# EAGLE board eom_test_pcb (EAGLE 9.6.2)
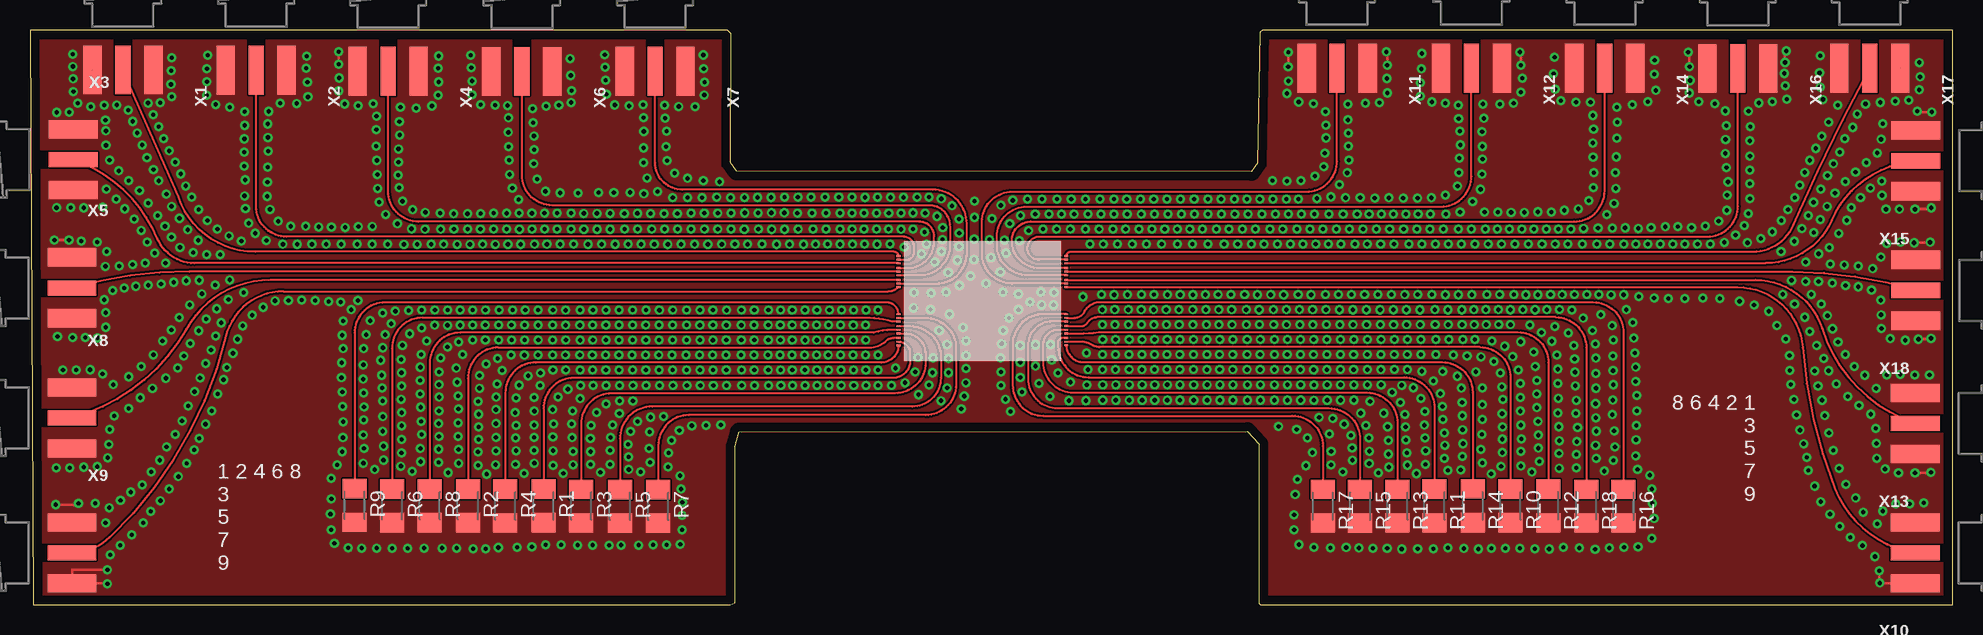
[diagram p0: board, top side]
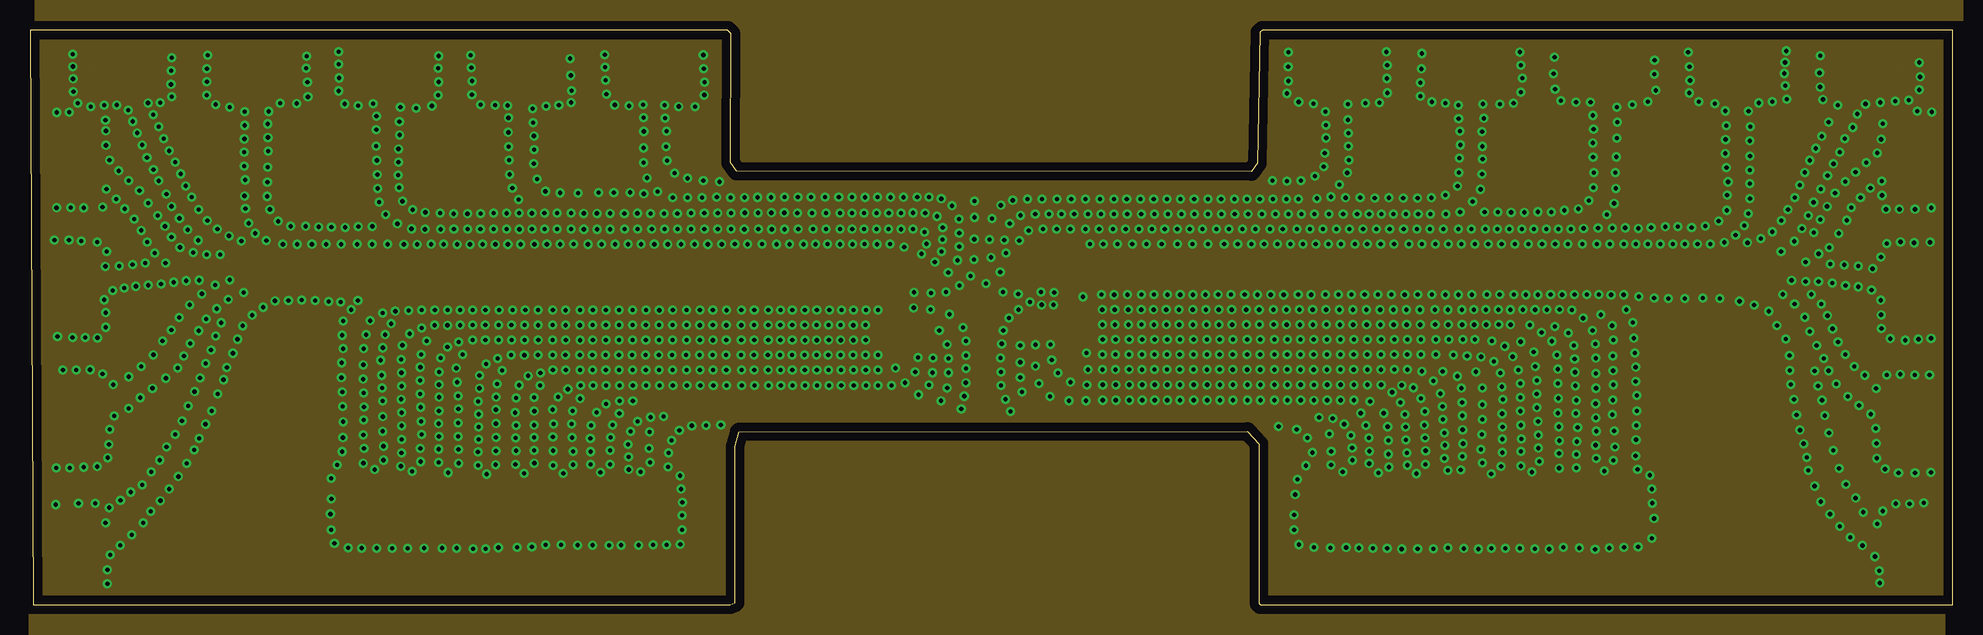
[diagram p1: board, inner layer Route2]
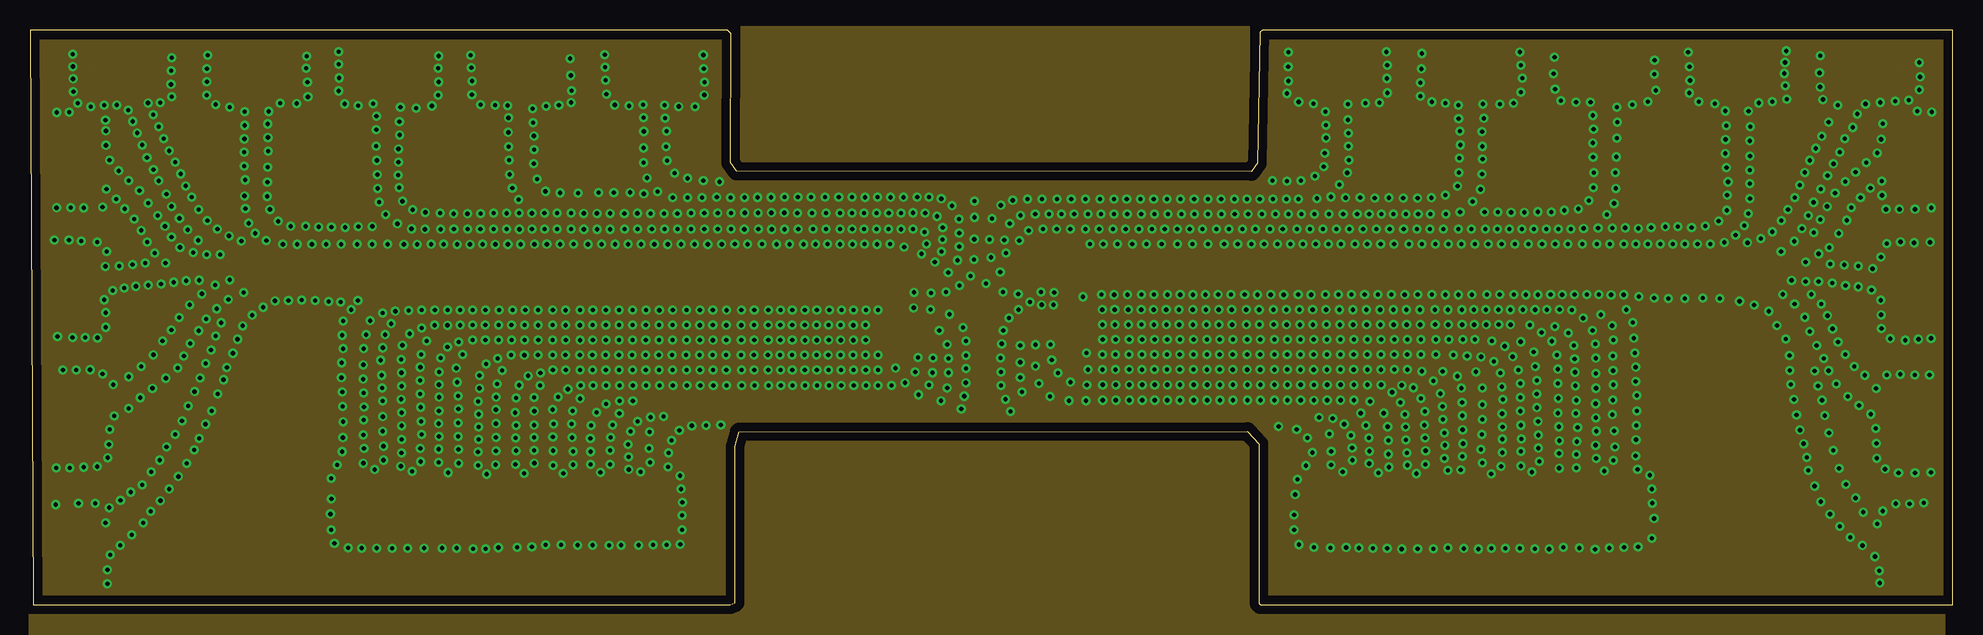
[diagram p2: board, inner layer Route15]
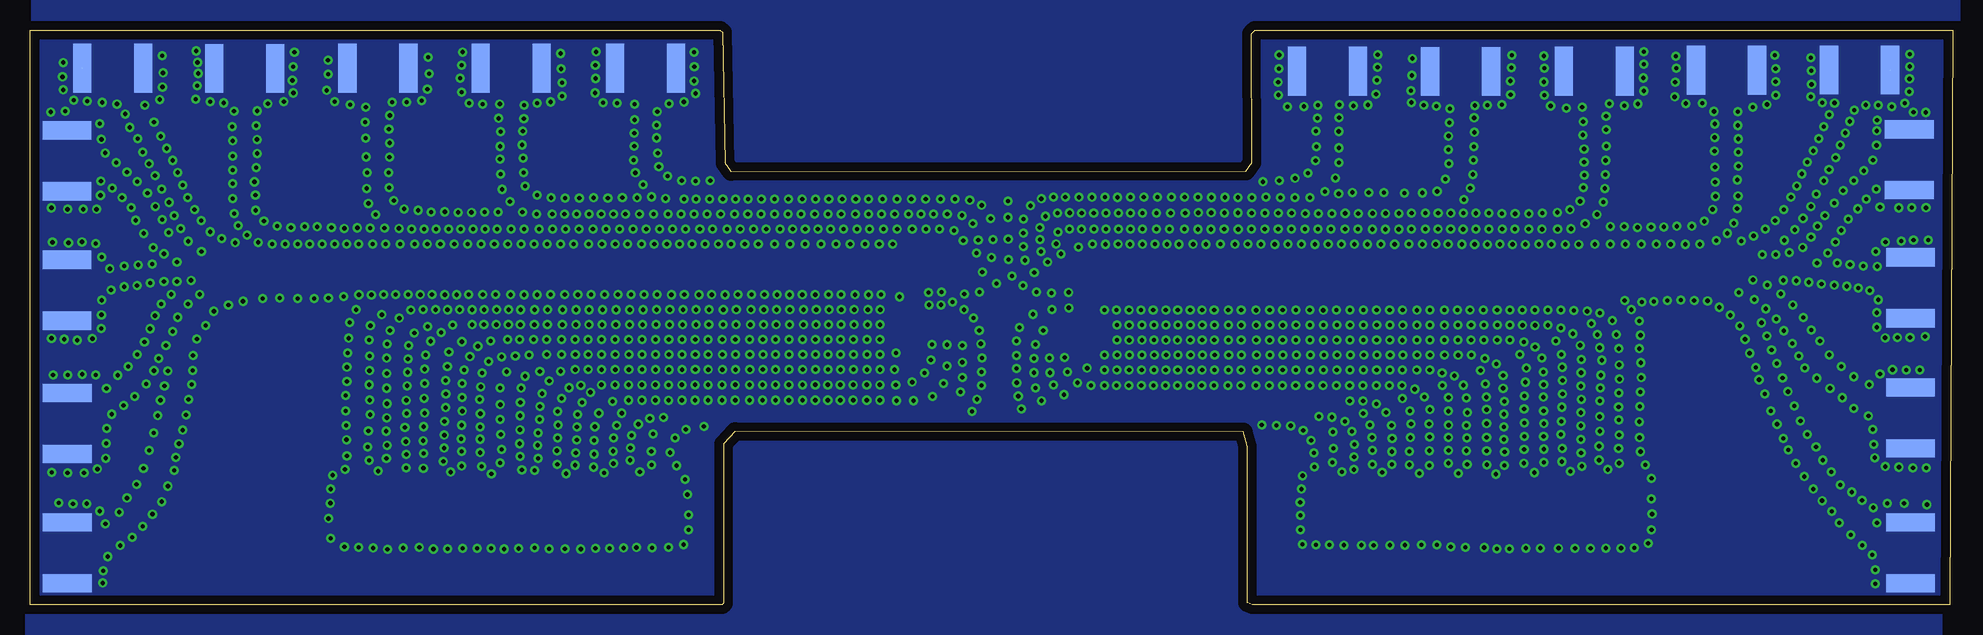
[diagram p3: board, bottom side, seen from below]

Size 160.25 x 47.95 mm. Coordinates in mm from the lower left corner, seen from the top.
Outline: 0.25,0 58.36,0 58.77,0.16 58.77,13.23 59.11,14.43 101.5,14.46 102.43,13.44 102.43,0.15 102.58,0 160.25,0 160.25,47.93 102.72,47.94 102.52,47.74 102.33,36.84 101.81,36.13 58.91,36.16 58.41,36.87 58.42,47.64 58.16,47.93 0,47.93 0.25,0
Copper layers (1*2+15+16): Top 0.035mm / dielectric 4mil / Route2 0.035mm / dielectric 1.15mm / Route15 0.035mm / dielectric 0.2mm / Bottom 0.035mm
Design rules "default *": minimum track width 6mil, minimum drill 0.35mm, track to track 3mil, track to pad 3mil, pad to pad 4mil, via to via 6mil, smd to smd 6mil, copper to edge 30mil, drill to drill 6mil, minimum pad ring 10mil, minimum via ring 8mil, stop-mask expansion 4mil, vias tented up to drill 0mil, thermal gap 10mil

## Footprints (pad centres in the part's own frame; a part is rotated, then mirrored left to right if it is on the bottom)
M1206 = smd 1.6 x 2: 1 -1.4,0; 2 1.4,0
SIGNAL_BONDING_PAD = smd 0.152 x 0.305: P$1 0,0
SMA_EDGELAUNCH = smd 4.064 x 1.524: GND@1 2.032,-2.54; GND@2 2.032,2.54 | smd 4.064 x 1.524 bottom: GND@3 2.032,2.54; GND@4 2.032,-2.54 | smd 4.064 x 1.27: P 2.032,0

## Placement (x,y rotation side)
R1  [M1206]  42.8,8.26 270 top
R2  [M1206]  36.5,8.25 270 top
R3  [M1206]  45.94,8.24 270 top
R4  [M1206]  39.62,8.25 270 top
R5  [M1206]  49.17,8.21 270 top
R6  [M1206]  30.18,8.26 270 top
R7  [M1206]  52.37,8.22 270 top
R8  [M1206]  33.32,8.26 270 top
R9  [M1206]  27.05,8.29 270 top
R10  [M1206]  123.41,8.26 270 top
R11  [M1206]  117.07,8.25 270 top
R12  [M1206]  126.56,8.25 270 top
R13  [M1206]  113.98,8.24 270 top
R14  [M1206]  120.26,8.26 270 top
R15  [M1206]  110.87,8.23 270 top
R16  [M1206]  132.83,8.23 270 top
R17  [M1206]  107.76,8.24 270 top
R18  [M1206]  129.72,8.24 270 top
U$1  SIGNAL_BONDING_DEVICE  [SIGNAL_BONDING_PAD]  72.39,29.09 90 top
U$2  SIGNAL_BONDING_DEVICE  [SIGNAL_BONDING_PAD]  72.39,21.94 90 top
U$3  SIGNAL_BONDING_DEVICE  [SIGNAL_BONDING_PAD]  72.39,28.79 90 top
U$4  SIGNAL_BONDING_DEVICE  [SIGNAL_BONDING_PAD]  72.39,22.24 90 top
U$5  SIGNAL_BONDING_DEVICE  [SIGNAL_BONDING_PAD]  72.39,28.49 90 top
U$6  SIGNAL_BONDING_DEVICE  [SIGNAL_BONDING_PAD]  72.39,22.64 90 top
U$7  SIGNAL_BONDING_DEVICE  [SIGNAL_BONDING_PAD]  72.39,28.09 90 top
U$8  SIGNAL_BONDING_DEVICE  [SIGNAL_BONDING_PAD]  72.39,21.64 90 top
U$9  SIGNAL_BONDING_DEVICE  [SIGNAL_BONDING_PAD]  72.39,27.79 90 top
U$10  SIGNAL_BONDING_DEVICE  [SIGNAL_BONDING_PAD]  72.39,23.24 90 top
U$11  SIGNAL_BONDING_DEVICE  [SIGNAL_BONDING_PAD]  72.39,27.49 90 top
U$12  SIGNAL_BONDING_DEVICE  [SIGNAL_BONDING_PAD]  72.39,23.64 90 top
U$13  SIGNAL_BONDING_DEVICE  [SIGNAL_BONDING_PAD]  72.39,26.8 90 top
U$14  SIGNAL_BONDING_DEVICE  [SIGNAL_BONDING_PAD]  72.39,23.94 90 top
U$15  SIGNAL_BONDING_DEVICE  [SIGNAL_BONDING_PAD]  72.39,27.1 90 top
U$16  SIGNAL_BONDING_DEVICE  [SIGNAL_BONDING_PAD]  72.39,22.94 90 top
U$17  SIGNAL_BONDING_DEVICE  [SIGNAL_BONDING_PAD]  72.39,26.5 90 top
U$18  SIGNAL_BONDING_DEVICE  [SIGNAL_BONDING_PAD]  72.39,24.24 90 top
U$19  SIGNAL_BONDING_DEVICE  [SIGNAL_BONDING_PAD]  86.38,26.5 90 top
U$20  SIGNAL_BONDING_DEVICE  [SIGNAL_BONDING_PAD]  86.38,21.95 90 top
U$21  SIGNAL_BONDING_DEVICE  [SIGNAL_BONDING_PAD]  86.38,26.8 90 top
U$22  SIGNAL_BONDING_DEVICE  [SIGNAL_BONDING_PAD]  86.38,22.25 90 top
U$23  SIGNAL_BONDING_DEVICE  [SIGNAL_BONDING_PAD]  86.38,27.49 90 top
U$24  SIGNAL_BONDING_DEVICE  [SIGNAL_BONDING_PAD]  86.38,22.64 90 top
U$25  SIGNAL_BONDING_DEVICE  [SIGNAL_BONDING_PAD]  86.38,27.1 90 top
U$26  SIGNAL_BONDING_DEVICE  [SIGNAL_BONDING_PAD]  86.38,22.94 90 top
U$27  SIGNAL_BONDING_DEVICE  [SIGNAL_BONDING_PAD]  86.39,28.09 90 top
U$28  SIGNAL_BONDING_DEVICE  [SIGNAL_BONDING_PAD]  86.38,21.65 90 top
U$29  SIGNAL_BONDING_DEVICE  [SIGNAL_BONDING_PAD]  86.39,28.49 90 top
U$30  SIGNAL_BONDING_DEVICE  [SIGNAL_BONDING_PAD]  86.38,23.64 90 top
U$31  SIGNAL_BONDING_DEVICE  [SIGNAL_BONDING_PAD]  86.39,28.79 90 top
U$32  SIGNAL_BONDING_DEVICE  [SIGNAL_BONDING_PAD]  86.38,23.94 90 top
U$33  SIGNAL_BONDING_DEVICE  [SIGNAL_BONDING_PAD]  86.39,29.09 90 top
U$34  SIGNAL_BONDING_DEVICE  [SIGNAL_BONDING_PAD]  86.38,24.24 90 top
U$35  SIGNAL_BONDING_DEVICE  [SIGNAL_BONDING_PAD]  86.38,27.79 90 top
U$36  SIGNAL_BONDING_DEVICE  [SIGNAL_BONDING_PAD]  86.38,23.24 90 top
X1  [SMA_EDGELAUNCH]  7.74,46.63 270 top
X2  [SMA_EDGELAUNCH]  18.84,46.62 270 top
X3  [SMA_EDGELAUNCH]  1.57,37.12 0 top
X4  [SMA_EDGELAUNCH]  29.85,46.53 270 top
X5  [SMA_EDGELAUNCH]  1.46,26.43 0 top
X6  [SMA_EDGELAUNCH]  41,46.51 270 top
X7  [SMA_EDGELAUNCH]  52.11,46.53 270 top
X8  [SMA_EDGELAUNCH]  1.46,15.59 0 top
X9  [SMA_EDGELAUNCH]  1.47,4.34 0 top
X10  [SMA_EDGELAUNCH]  159.18,4.34 180 top
X11  [SMA_EDGELAUNCH]  108.95,46.78 270 top
X12  [SMA_EDGELAUNCH]  120.15,46.79 270 top
X13  [SMA_EDGELAUNCH]  159.18,15.13 180 top
X14  [SMA_EDGELAUNCH]  131.25,46.78 270 top
X15  [SMA_EDGELAUNCH]  159.21,37.03 180 top
X16  [SMA_EDGELAUNCH]  142.36,46.76 270 top
X17  [SMA_EDGELAUNCH]  153.36,46.78 270 top
X18  [SMA_EDGELAUNCH]  159.21,26.23 180 top

## Library data of the parts
R1-R18 X1-X18 = adafruit
U$1-U$36 = eom_chip_lib

## Nets
GND: R1.2 R2.2 R3.2 R4.2 R5.2 R6.2 R7.2 R8.2 R9.2 R10.2 R11.2 R12.2 R13.2 R14.2 R15.2 R16.2 R17.2 R18.2 X1.GND@1 X1.GND@2 X1.GND@3 X1.GND@4 X2.GND@1 X2.GND@2 X2.GND@3 X2.GND@4 X3.GND@1 X3.GND@2 X3.GND@3 X3.GND@4 X4.GND@1 X4.GND@2 X4.GND@3 X4.GND@4 X5.GND@1 X5.GND@2 X5.GND@3 X5.GND@4 X6.GND@1 X6.GND@2 X6.GND@3 X6.GND@4 X7.GND@1 X7.GND@2 X7.GND@3 X7.GND@4 X8.GND@1 X8.GND@2 X8.GND@3 X8.GND@4 X9.GND@1 X9.GND@2 X9.GND@3 X9.GND@4 X10.GND@1 X10.GND@2 X10.GND@3 X10.GND@4 X11.GND@1 X11.GND@2 X11.GND@3 X11.GND@4 X12.GND@1 X12.GND@2 X12.GND@3 X12.GND@4 X13.GND@1 X13.GND@2 X13.GND@3 X13.GND@4 X14.GND@1 X14.GND@2 X14.GND@3 X14.GND@4 X15.GND@1 X15.GND@2 X15.GND@3 X15.GND@4 X16.GND@1 X16.GND@2 X16.GND@3 X16.GND@4 X17.GND@1 X17.GND@2 X17.GND@3 X17.GND@4 X18.GND@1 X18.GND@2 X18.GND@3 X18.GND@4
N$1: U$1.P$1 X1.P
N$2: R1.1 U$2.P$1
N$3: U$3.P$1 X2.P
N$4: R2.1 U$4.P$1
N$5: U$5.P$1 X3.P
N$6: R3.1 U$6.P$1
N$7: U$7.P$1 X4.P
N$8: R4.1 U$8.P$1
N$9: U$9.P$1 X5.P
N$10: R5.1 U$10.P$1
N$11: U$11.P$1 X6.P
N$12: R6.1 U$12.P$1
N$13: U$13.P$1 X7.P
N$14: R7.1 U$14.P$1
N$15: U$15.P$1 X8.P
N$16: R8.1 U$16.P$1
N$17: U$17.P$1 X9.P
N$18: R9.1 U$18.P$1
N$19: U$19.P$1 X10.P
N$20: R10.1 U$20.P$1
N$21: U$21.P$1 X11.P
N$22: R11.1 U$22.P$1
N$23: U$23.P$1 X12.P
N$24: R12.1 U$24.P$1
N$25: U$25.P$1 X13.P
N$26: R13.1 U$26.P$1
N$27: U$27.P$1 X14.P
N$28: R14.1 U$28.P$1
N$29: U$29.P$1 X15.P
N$30: R15.1 U$30.P$1
N$31: U$31.P$1 X16.P
N$32: R16.1 U$32.P$1
N$33: U$33.P$1 X17.P
N$34: R17.1 U$34.P$1
N$35: U$35.P$1 X18.P
N$36: R18.1 U$36.P$1

## Tracks (layer width: path | path; a pad name or v marks a point on that pad's centre or on a via)
GND  (via drill 0.35, 0.35 pad 0.55)  (2 unrouted)
  Top 0.203: v158.53,41.1 157.32,41.1 v157.32,41.17 | v146.39,46.19 146.29,46.19 v146.29,45.23 | v25.74,46.13 v25.74,45.09 | v157.12,32.99 158.47,32.99 v158.47,33.11 | v158.46,22.23 158.46,22.16 v157.41,22.16 | v157.12,11 158.45,11 v158.45,11.04 | v104.88,44.88 104.89,44.88 v104.89,46.1 | v157.05,30.2 158.38,30.2 v158.38,30.24 | v138.21,46.1 138.33,46.1 v138.33,44.88 | v124.19,46.11 124.26,46.11 v124.26,45.02 | v154.18,1.82 154.18,1.8 X10.GND@2 154.15,1.8 v154.15,2.84 | v2.13,8.36 4.04,8.36 v4.04,8.46 | v113.13,45 113.13,46.12 v113.06,46.12 | v6.45,1.76 6.45,1.8 X9.GND@1 3.51,2.93 v6.45,2.93 | v2.04,30.43 v3.25,30.43
  other vias: 70.65,34 71.73,33.99 72.82,33.99 73.95,34 74.95,34 75.96,33.87 76.86,33.29 77.43,32.18 77.46,31.01 77.46,29.89 77.31,28.74 76.54,27.72 75.42,28.58 69.6,33.99 68.52,34 67.42,34 66.27,34 65.11,34.01 64.01,34.01 62.89,34 61.78,33.99 60.65,33.99 59.57,33.98 58.39,33.96 57.24,34.01 52.31,34.47 51.44,35.6 51.15,36.89 51.14,38.11 51.16,39.48 51.13,40.63 51.1,41.7 52.89,41.66 52.94,40.59 53.06,39.51 53.01,38.2 53.09,37.04 53.72,36.01 54.8,35.57 56.12,35.37 57.48,35.28 56.01,33.98 54.82,33.97 53.58,33.98 75.98,29.47 76.07,30.45 76.08,31.47 75.61,32.4 74.62,32.68 73.59,32.69 72.59,32.67 71.59,32.67 70.56,32.68 69.52,32.67 68.53,32.66 67.53,32.66 66.35,32.67 65.18,32.67 63.96,32.67 62.87,32.7 61.8,32.7 60.69,32.69 59.58,32.7 58.43,32.68 74.32,29.27 74.72,30.11 74.57,31.08 73.61,31.34 72.6,31.32 71.57,31.33 70.57,31.34 70.69,24.6 70.7,20.83 70.69,18.31 74.01,20.62 75.28,20.58 76.56,20.55 78.71,30.49 79.97,30.47 83.15,33.84 81.21,30.43 83.79,32.59 82.46,30.39 84.44,31.34 88.35,30.08 89.32,25.87 89.38,24.62 89.39,23.37 89.42,22.12 89.41,20.87 89.4,19.62 89.42,18.36 85.07,21.71 89.42,17.07 83.82,21.69 82.54,21.62 57.33,32.67 56.21,32.66 55.09,32.67 53.96,32.64 52.86,32.63 51.73,32.63 50.63,32.65 49.54,32.63 48.34,32.65 47.26,32.65 46.16,32.65 43.94,32.66 42.88,32.66 41.83,32.66 40.78,32.67 39.72,32.66 38.64,32.68 37.56,32.64 36.47,32.62 35.32,32.62 34.18,32.68 32.95,32.73 31.89,32.95 31.05,33.66 30.78,34.79 30.7,35.85 30.71,38.02 30.71,36.92 71.68,30.08 72.87,29.84 63.54,23.33 62.54,23.33 61.54,23.33 60.36,23.33 59.29,23.33 58.04,23.33 56.92,23.33 55.83,23.33 54.72,23.33 53.56,23.33 52.43,23.33 51.33,23.33 50.22,23.33 49.11,23.33 48,23.33 46.91,23.33 45.83,23.33 44.64,23.33 43.57,23.33 42.36,23.33 41.24,23.33 40.13,23.33 37.95,23.33 36.89,23.33 35.84,23.33 34.8,23.31 33.73,23.33 66.57,23.33 65.57,23.33 64.58,23.33 69.65,23.33 68.63,23.33 67.57,23.33 63.54,24.6 62.55,24.59 61.55,24.59 60.37,24.59 59.3,24.58 58.05,24.58 56.92,24.6 55.84,24.6 54.73,24.59 53.58,24.6 52.46,24.58 51.35,24.59 50.23,24.59 49.11,24.59 48.01,24.59 46.92,24.59 45.84,24.58 44.65,24.58 43.58,24.58 42.36,24.6 41.29,24.59 40.22,24.59 37.96,24.59 36.9,24.59 35.86,24.58 34.82,24.58 33.74,24.58 39.11,24.59 39.07,23.33 69.69,24.58 68.63,24.58 67.64,24.59 66.63,24.59 65.58,24.58 64.59,24.59 69.53,31.34 68.53,31.34 67.53,31.34 66.36,31.34 65.28,31.34 64.04,31.33 62.89,31.32 61.83,31.32 60.71,31.34 59.54,31.32 58.44,31.33 57.33,31.33 56.21,31.34 55.1,31.34 53.99,31.34 52.9,31.34 51.83,31.34 50.64,31.33 49.56,31.34 48.35,31.32 47.26,31.32 46.16,31.32 43.94,31.34 42.89,31.34 41.84,31.33 40.79,31.32 39.73,31.33 38.65,31.34 37.54,31.34 36.49,31.34 35.33,31.34 34.22,31.33 66.47,30.08 65.48,30.07 64.48,30.07 63.3,30.08 62.23,30.07 61.02,30.08 59.81,30.07 58.75,30.08 57.66,30.07 56.5,30.07 55.39,30.07 54.28,30.08 53.16,30.07 52.04,30.08 50.94,30.08 49.85,30.07 48.77,30.07 47.64,30.07 46.51,30.07 45.32,30.08 44.2,30.07 43.08,30.08 40.89,30.07 39.83,30.07 38.79,30.07 37.73,30.08 36.67,30.07 35.6,30.07 34.49,30.07 33.44,30.07 32.28,30.07 31.16,30.07 42.04,30.08 45.1,31.34 69.55,30.08 68.56,30.08 67.52,30.08 70.61,30.07 45.09,32.67 63.54,22.08 62.55,22.08 61.54,22.08 60.37,22.08 59.29,22.08 58.04,22.08 56.92,22.08 55.84,22.08 54.72,22.08 53.56,22.08 52.44,22.08 51.33,22.08 50.22,22.08 49.11,22.08 48,22.08 46.91,22.08 45.86,22.08 44.66,22.08 43.57,22.08 42.37,22.08 41.24,22.08 40.14,22.08 37.96,22.08 36.9,22.08 66.58,22.08 65.58,22.08 64.6,22.08 69.66,22.08 68.63,22.08 67.58,22.08 39.07,22.08 63.57,18.31 62.58,18.31 61.56,18.3 60.4,18.3 59.33,18.3 58.07,18.3 56.96,18.3 55.87,18.3 54.75,18.3 53.59,18.31 52.47,18.31 51.36,18.31 50.25,18.31 49.14,18.3 48.03,18.3 46.93,18.31 45.89,18.3 66.6,18.3 65.61,18.31 64.61,18.3 69.69,18.3 68.66,18.3 67.62,18.31 50.25,17.01 49.14,17.01 63.54,19.58 62.55,19.58 61.54,19.58 60.37,19.58 59.3,19.58 58.04,19.58 56.93,19.58 55.84,19.58 54.73,19.58 53.56,19.59 52.44,19.58 51.33,19.58 50.23,19.59 49.11,19.58 48,19.58 46.91,19.59 45.86,19.58 44.66,19.58 43.58,19.58 66.57,19.58 65.58,19.58 64.59,19.58 69.66,19.58 68.64,19.58 67.59,19.58 32.92,31.32 31.8,31.36 30.63,31.78 29.64,32.56 29.1,33.59 28.98,34.73 28.95,35.89 28.91,37.07 28.85,38.27 28.87,39.62 28.88,40.75 28.6,41.79 30.82,39.19 30.79,40.3 30.87,41.51 32.19,41.42 33.5,41.61 34.02,42.52 34.05,43.61 34.02,44.77 34.05,45.78 27.35,41.63 26.24,41.78 25.74,42.86 25.77,43.94 40.74,33.79 40.21,34.76 39.98,35.9 39.94,37.09 39.91,38.22 39.87,39.41 39.88,40.62 39.82,41.65 38.77,41.69 37.57,41.72 36.84,42.55 36.85,43.69 36.79,44.81 36.72,45.85 41.91,41.37 41.93,40.23 42.01,39.11 42.02,37.97 42,36.8 42.27,35.51 42.96,34.49 44.18,34.36 45.69,34.33 47.41,34.39 48.66,34.37 50.02,34.4 51.17,34.28 43.03,41.59 44.08,41.67 45.12,41.9 45.15,42.89 45.08,44.15 45.03,45.56 49.94,41.62 48.74,41.69 48.05,42.58 47.97,43.76 47.93,44.85 47.91,45.88 56.13,45.86 56.16,44.72 56.22,43.58 56.2,42.52 55.44,41.56 54.08,41.57 28.54,31.56 27.37,31.54 26.26,31.48 25.13,31.5 24.06,31.52 22.99,31.58 21.74,31.58 20.68,31.99 20,32.98 19.76,34.07 19.79,35.27 19.8,36.52 19.84,37.84 19.83,38.98 19.82,40.11 19.88,41.15 20.86,41.83 22.22,41.81 23.17,42.37 23.12,43.6 23.03,44.76 23.06,45.76 14.81,45.84 14.75,44.72 14.75,43.63 14.74,42.51 15.47,41.73 16.64,41.5 17.9,41.14 17.9,39.99 17.87,38.86 17.85,37.77 17.84,36.6 17.93,35.44 17.88,34.11 17.96,33.05 18.23,31.83 18.78,30.99 19.7,30.38 21.08,30.08 22.27,30.07 23.5,30.08 24.69,30.08 25.94,30.08 27.27,30.08 28.51,30.08 29.82,30.08 17.62,30.34 16.59,30.77 15.62,31.35 14.79,32.04 14.06,32.96 13.47,34.02 12.99,34.94 12.56,35.95 12.11,36.93 11.61,37.87 11.15,38.88 10.73,39.88 10.28,40.88 9.84,41.85 10.86,41.87 11.82,42.38 11.75,43.41 11.78,44.54 11.81,45.64 8.18,41.25 7.24,41.69 6.19,41.68 5.06,41.56 3.98,41.83 3.62,42.81 3.59,43.87 3.58,44.9 3.56,45.94 2.24,41.07 3.26,41.08 6.29,40.43 6.33,39.53 6.34,38.33 6.63,37.09 7.4,36.2 8.22,35.38 9.13,34.55 9.86,33.51 10.64,32.48 11.25,31.58 11.79,30.67 12.5,29.82 13.61,29.38 14.74,29.22 15.86,29.21 14.03,30.4 13.14,31.28 12.46,32.24 11.8,33.23 11.37,34.26 10.73,35.37 10.29,36.31 9.75,37.29 9.35,38.36 8.93,39.36 8.57,40.32 73.68,26.06 73.66,24.77 75.1,26 75.06,24.64 76.36,26.1 77.48,26.64 78.4,27.41 78.7,28.8 78.73,32.32 78.73,33.67 81.92,33.74 80.92,33.33 80.18,32.21 81.66,31.8 82.57,32.48 83.24,31.21 80.88,27.76 80.1,28.98 81.35,29.35 75.23,19.36 74.93,18.34 74.07,17.53 76.56,19.36 76.45,18.09 75.95,17.02 76.45,21.72 75.79,22.89 73.79,19.44 72.95,18.52 71.81,18.29 72.14,19.74 16.64,27.11 15.44,26.67 14.33,25.94 13.31,25.02 12.45,23.96 11.79,22.92 11.05,22 10.29,20.86 9.27,19.89 8.23,19.03 6.93,18.37 6.05,19.26 5,19.61 3.86,19.59 2.74,19.59 2.18,11.43 3.3,11.43 4.47,11.49 5.61,11.54 6.48,12.27 6.58,13.39 6.65,14.64 7.01,15.75 8.23,16.39 9.19,17.28 10.21,18.06 11.33,18.9 12.32,19.77 12.83,20.76 13.36,21.8 14.07,22.86 14.68,23.83 15.57,24.69 16.54,25.46 17.81,26.04 15.93,23.53 15.47,22.43 15.09,21.26 14.66,20.12 14.17,18.93 13.72,17.78 13.18,16.59 12.67,15.35 12.12,14.2 11.38,13.16 10.82,12.07 10.11,11.08 9.35,10.01 27.33,25.38 25.9,25.27 24.9,25.3 23.77,25.39 22.66,25.42 21.54,25.38 20.42,25.35 19.43,24.82 18.52,24.16 17.73,23.27 17.3,22.15 16.92,20.99 16.41,19.79 16.13,18.78 15.65,17.58 15.14,16.18 14.63,15.07 14.1,13.87 13.69,12.93 13.06,11.79 12.37,10.7 11.61,9.66 10.87,8.69 10.06,7.8 9.45,6.84 8.48,5.85 7.52,4.96 6.68,4.17 8.41,9.4 7.54,8.72 6.6,8.11 6.3,6.84 5.44,8.46 77.62,16.34 77.88,17.4 78,18.52 78.03,19.72 78.03,20.81 78.03,22 77.77,23.14 76.66,24.24 81.74,16.13 81.31,17.15 80.95,18.29 80.95,19.44 80.9,20.58 81,21.77 81.13,22.89 81.61,23.93 82.4,24.62 83.36,25.25 82.37,25.91 81.1,26.09 79.68,26.8 85.37,26.04 84.28,26.09 84.33,25.02 85.32,25.02 32.64,24.59 31.57,24.54 30.45,24.49 29.39,24.34 28.35,23.7 28.02,22.53 27.81,21.37 27.79,20.02 27.76,18.83 27.81,17.68 27.84,16.51 27.81,15.42 27.79,14.18 27.84,13.06 27.79,11.82 28.73,11.28 29.46,12.07 29.46,13.24 29.39,14.48 29.41,15.7 29.39,17 29.36,18.09 29.31,19.16 29.24,20.4 29.41,21.44 29.62,22.53 30.1,23.45 32.64,23.09 31.65,22.61 31.04,21.65 30.94,20.48 30.96,19.36 30.99,18.24 30.94,17.15 30.99,16.03 30.99,14.94 30.99,13.8 30.96,12.68 30.91,11.56 31.85,11.13 32.56,11.94 32.54,13.06 32.64,14.2 32.61,15.3 32.56,16.49 32.51,17.58 32.51,18.72 32.54,19.82 32.61,20.88 33.07,22 35.74,21.93 34.8,21.52 34.24,20.58 34.11,19.44 34.09,18.37 34.11,17.33 34.09,16.18 34.06,15.12 34.09,14.05 34.06,12.98 34.06,11.89 34.85,11.03 35.74,11.82 35.71,12.96 35.69,14.05 35.69,15.17 35.71,16.34 35.69,17.43 35.61,18.57 35.53,19.74 36.07,20.88 38.99,20.55 38.02,20.1 37.46,19.13 37.46,18.06 37.36,16.97 37.39,15.91 37.39,14.84 37.39,13.8 37.34,12.76 37.36,11.64 38.07,10.9 38.81,11.69 38.84,12.83 38.84,13.97 38.84,15.12 38.84,16.29 38.86,17.33 38.94,18.42 39.34,19.54 42.54,19.33 41.53,19.11 40.77,18.32 40.51,17.25 40.44,16.03 40.51,14.97 40.49,13.92 40.51,12.86 40.46,11.71 41.2,10.98 42.04,11.82 42.01,12.88 42.01,13.97 42.01,14.99 42.04,16.16 42.01,17.3 42.52,18.29 44.83,17.99 44.02,17.35 43.56,16.29 43.64,15.09 43.59,14 43.61,12.86 43.61,11.64 44.45,10.98 45.26,11.69 45.26,12.81 45.19,13.95 45.14,15.09 45.24,16.18 45.85,17.2 48.03,16.77 47.22,16.06 46.76,14.97 46.71,13.87 46.74,12.78 46.74,11.71 47.55,11.05 48.36,11.71 48.36,12.88 48.39,13.97 48.56,15.02 49.12,15.96 52.81,15.73 51.74,15.65 50.65,15.3 50.06,14.46 49.86,13.39 49.89,12.35 49.91,11.28 50.9,11.08 51.69,11.89 51.61,13.06 51.64,14.43 57.58,15.02 56.36,14.97 55.17,14.94 54.13,14.56 53.47,13.72 53.24,12.68 53.19,11.51 54.18,10.77 54.28,9.66 54.38,8.54 54.36,7.47 54.36,6.25 54.2,5.06 53.06,5.01 51.94,5.01 50.72,4.98 49.28,4.98 48.26,4.96 46.89,4.98 45.64,4.98 44.27,5.01 42.98,5.01 41.83,4.83 40.61,4.81 39.04,4.78 37.97,4.68 36.93,4.68 35.56,4.73 34.37,4.73 32.84,4.73 31.47,4.7 30.18,4.7 28.91,4.73 27.64,4.73 26.52,4.75 25.37,5.14 25.1,6.25 25.04,7.57 25.12,8.84 25.1,10.55 25.6,11.66 26.01,12.78 26.09,13.95 26.11,15.27 26.06,16.54 26.04,17.76 25.96,18.95 25.98,20.2 26.11,21.37 26.01,22.48 26.11,23.68 26.77,24.62 11.3,28.51 10.4,29.34 9.76,30.25 9.26,31.23 8.69,32.17 7.9,33.03 7.18,33.84 6.37,34.68 2.21,33.12 3.4,33.14 4.48,33.11 6.05,33.18 4.26,30.34 5.59,30.27 6.4,29.46 6.28,28.23 7.44,28.27 8.55,28.39 9.61,28.5 14.11,27.07 13.01,27.03 11.98,26.9 10.92,26.75 9.87,26.66 8.83,26.57 7.85,26.41 6.9,26.21 6.2,25.44 6.32,24.37 6.3,23.15 5.62,22.27 4.59,22.3 3.55,22.29 2.29,22.38 63.51,20.84 62.52,20.84 61.51,20.83 60.34,20.83 59.27,20.83 58.01,20.83 56.9,20.83 55.81,20.83 54.69,20.83 53.53,20.84 52.41,20.84 51.3,20.84 50.2,20.84 49.08,20.83 47.97,20.83 46.88,20.84 45.83,20.83 44.63,20.83 43.55,20.84 42.34,20.83 41.21,20.83 40.11,20.83 66.54,20.84 65.55,20.84 64.55,20.83 69.63,20.83 68.61,20.83 67.56,20.84 101.44,33.84 102.51,33.84 103.6,33.84 104.73,33.84 105.73,33.84 100.4,33.83 99.29,33.84 98.19,33.84 97.04,33.83 95.89,33.83 94.78,33.84 93.67,33.83 92.55,33.84 91.42,33.83 90.35,33.83 89.18,33.84 87.98,33.83 86.79,33.84 85.59,33.83 84.35,33.84 116.72,32.59 115.71,32.59 114.68,32.59 113.65,32.59 112.64,32.59 111.63,32.59 110.62,32.59 109.46,32.59 108.27,32.59 107.07,32.59 105.99,32.59 104.9,32.59 103.81,32.59 102.68,32.59 101.54,32.59 100.42,32.59 99.3,32.59 98.19,32.59 97.07,32.59 95.98,32.59 94.84,32.59 93.73,32.59 92.63,32.59 91.46,32.59 90.36,32.59 89.27,32.59 87.04,32.59 85.98,32.59 84.93,32.59 88.18,32.59 70.69,19.58 140.07,30.09 134.86,30.09 133.87,30.08 132.86,30.08 131.69,30.09 130.62,30.08 129.4,30.09 128.19,30.09 127.13,30.09 126.04,30.09 124.88,30.08 123.78,30.08 122.66,30.09 121.55,30.08 120.43,30.09 119.32,30.09 118.23,30.08 117.16,30.08 116.02,30.08 114.94,30.09 113.7,30.09 112.58,30.08 111.47,30.09 109.28,30.08 108.22,30.08 107.17,30.08 106.11,30.09 105.07,30.08 103.99,30.08 102.87,30.08 101.82,30.09 100.67,30.09 99.54,30.09 110.43,30.09 137.94,30.09 136.94,30.09 135.9,30.09 138.99,30.08 89.46,30.09 90.65,30.08 91.88,30.09 93.07,30.09 94.33,30.09 95.66,30.09 96.9,30.09 98.2,30.09 127.4,31.34 126.39,31.34 125.36,31.35 124.36,31.34 123.31,31.34 122.32,31.34 121.32,31.34 120.14,31.34 119.06,31.34 117.82,31.34 116.68,31.34 115.61,31.34 114.5,31.33 113.33,31.34 112.23,31.34 111.12,31.34 109.99,31.34 108.88,31.34 107.78,31.34 106.69,31.34 105.61,31.34 104.42,31.34 103.35,31.34 102.15,31.33 101.05,31.33 99.95,31.33 97.74,31.34 96.67,31.34 95.63,31.34 94.58,31.34 93.51,31.34 92.44,31.34 91.33,31.33 90.28,31.33 89.12,31.33 87.97,31.35 98.89,31.34 86.72,31.35 85.58,31.34 128.51,24.6 121.36,24.62 120.36,24.62 119.35,24.61 118.19,24.61 117.1,24.62 115.86,24.61 114.72,24.61 113.65,24.61 112.54,24.61 111.39,24.61 110.26,24.61 109.16,24.61 108.03,24.62 106.92,24.62 105.82,24.62 104.72,24.62 103.65,24.62 102.46,24.61 101.38,24.62 100.17,24.62 99.09,24.62 98.03,24.62 95.77,24.62 94.71,24.62 93.66,24.62 92.63,24.62 91.55,24.62 96.92,24.62 127.49,24.62 126.44,24.61 125.46,24.61 124.44,24.61 123.39,24.61 122.4,24.62 90.42,24.62 132.84,25.86 131.79,25.86 130.78,25.87 129.76,25.87 125.68,25.86 124.69,25.86 123.68,25.87 122.51,25.87 121.43,25.87 120.19,25.87 119.06,25.86 117.98,25.86 116.86,25.88 115.67,25.87 114.59,25.87 113.48,25.87 112.36,25.88 111.25,25.87 110.14,25.88 109.06,25.88 107.98,25.87 106.79,25.86 105.71,25.87 104.5,25.86 103.42,25.87 102.31,25.86 100.1,25.87 99.04,25.88 97.99,25.87 96.94,25.86 95.88,25.87 94.8,25.87 93.69,25.87 92.64,25.87 91.48,25.87 90.37,25.86 101.25,25.88 128.74,25.87 127.72,25.87 126.75,25.87 121.38,23.37 120.38,23.37 119.38,23.37 118.21,23.37 117.13,23.37 115.88,23.37 114.75,23.37 113.67,23.37 112.56,23.37 111.42,23.37 110.28,23.37 109.18,23.37 108.06,23.37 106.95,23.37 105.85,23.37 104.74,23.37 103.67,23.37 102.49,23.37 101.4,23.37 100.21,23.37 99.11,23.37 98.05,23.37 95.79,23.37 94.73,23.37 93.69,23.37 92.65,23.37 91.57,23.37 96.94,23.37 123.41,23.37 122.42,23.37 90.44,23.37 107.45,15.62 108.59,15.55 109.54,15.07 110.1,14.14 110.21,13.09 110.24,12.06 109.42,11.09 108.45,11.69 108.46,12.8 108.31,14.26 110.92,15.99 111.34,14.97 111.6,13.92 111.65,12.81 111.62,11.78 112.4,11 113.27,11.49 113.24,12.57 113.24,13.71 113.17,14.86 112.84,15.99 111.7,16.96 113.54,17.73 114.24,16.87 114.6,15.88 114.66,14.85 114.68,13.76 114.76,12.67 114.81,11.65 115.57,10.94 116.3,11.72 116.33,12.85 116.28,13.92 116.24,14.99 116.27,16.13 115.93,17.21 115.31,18.11 114.34,18.32 116.03,19.48 116.97,18.67 117.56,17.62 117.75,16.55 117.77,15.48 117.91,14.35 117.94,13.31 117.9,12.23 118.18,11.21 119.26,11.26 119.41,12.37 119.45,13.44 119.42,14.61 119.4,15.78 119.38,16.89 119.31,18.07 118.97,19.07 117.76,19.47 118.65,20.84 119.79,20.75 120.95,20.69 122.02,20.3 122.56,19.33 122.68,18.19 122.78,17.13 122.71,15.94 122.75,14.85 122.73,13.82 122.74,12.7 122.62,11.56 121.8,10.92 121.06,11.84 120.94,12.96 121.01,14.21 121.06,15.47 121.05,16.7 121.06,18.08 120.52,19.44 121.85,22.01 122.92,21.57 123.59,20.7 124.07,19.6 124.23,18.48 124.23,17.29 124.22,16.16 124.27,14.99 124.31,13.84 124.27,12.8 124.27,11.58 125.2,11.07 125.8,11.96 125.73,13.08 125.72,14.16 125.7,15.29 125.6,16.45 125.59,17.58 125.62,18.71 125.46,19.87 125.34,21.09 124.26,21.95 125.02,23.33 125.99,22.7 126.86,21.99 127.26,20.85 127.37,19.66 127.35,18.48 127.39,17.23 127.35,15.99 127.44,14.86 127.49,13.69 127.45,12.62 127.46,11.4 128.9,11.42 128.89,12.54 128.93,13.62 129,14.81 128.86,15.96 128.89,17.07 128.81,18.27 128.79,19.41 128.75,20.5 128.69,21.63 128.22,22.68 127.11,23.22 129.47,23.91 130.25,22.88 130.48,21.76 130.52,20.58 130.51,19.31 130.54,18.07 130.5,16.78 130.51,15.61 130.57,14.49 130.5,13.31 130.55,12.22 131.24,11.16 131.98,12.05 132.12,13.16 132.05,14.51 131.89,15.87 131.93,17.08 131.98,18.36 131.96,19.53 131.93,20.76 131.98,22.1 131.88,23.28 130.93,24.2 133.06,24.61 133.6,23.55 133.69,22.24 133.78,21.01 133.84,19.83 133.84,18.63 133.93,17.47 133.93,16.16 133.89,14.97 133.87,13.77 133.84,12.43 134,11.29 135.02,10.81 135.2,9.66 135.22,8.48 135.37,7.2 135.2,5.55 134.04,4.85 132.87,4.81 131.65,4.74 130.46,4.63 129.15,4.74 127.8,4.81 126.63,4.66 125.43,4.68 124.19,4.72 122.97,4.72 121.82,4.72 120.73,4.66 119.52,4.7 118.19,4.76 116.97,4.68 115.67,4.68 114.34,4.66 113.12,4.72 111.95,4.72 110.77,4.74 109.71,4.79 108.4,4.76 107.03,4.81 105.77,5.03 105.37,6.27 105.37,7.52 105.46,9.2 105.66,10.45 106.36,11.61 106.91,12.7 106.47,13.93 105.58,14.64 104.08,14.89 82.54,20.23 82.54,18.96 82.7,17.75 88.02,17.03 86.61,17.03 85.01,17.39 84.11,18.46 83.82,19.91 85.16,20.44 85.69,19.33 86.72,18.57 88.09,18.35 88.19,19.62 88.06,21 87.78,25.69 112.62,18.35 111.48,18.36 110.35,18.35 109.25,18.36 108.12,18.36 107.01,18.35 105.91,18.36 104.81,18.36 103.74,18.35 102.56,18.36 101.47,18.36 100.27,18.36 99.18,18.36 98.12,18.36 95.86,18.36 94.8,18.36 93.75,18.36 92.71,18.36 91.63,18.36 97,18.36 90.51,18.36 114.8,19.62 113.72,19.62 112.61,19.62 111.47,19.62 110.33,19.62 109.23,19.62 108.11,19.62 107,19.61 105.9,19.62 104.8,19.62 103.72,19.62 102.54,19.62 101.45,19.62 100.26,19.62 99.16,19.62 98.1,19.62 95.84,19.62 94.78,19.62 93.74,19.62 92.69,19.62 91.62,19.62 96.99,19.62 90.49,19.62 117.18,20.88 115.93,20.88 114.8,20.88 113.72,20.88 112.61,20.87 111.47,20.87 110.33,20.87 109.23,20.88 108.1,20.88 107,20.88 105.89,20.88 104.79,20.88 103.72,20.88 102.54,20.88 101.45,20.88 100.25,20.87 99.16,20.87 98.1,20.88 95.84,20.87 94.78,20.88 93.73,20.87 92.69,20.87 91.62,20.87 96.98,20.88 90.48,20.87 120.44,22.13 119.43,22.13 118.27,22.13 117.19,22.12 115.94,22.13 114.81,22.13 113.73,22.13 112.62,22.13 111.48,22.13 110.34,22.13 109.24,22.13 108.11,22.13 107.01,22.13 105.9,22.13 104.8,22.13 103.73,22.13 102.55,22.12 101.46,22.13 100.26,22.13 99.17,22.13 98.11,22.13 95.85,22.13 94.79,22.13 93.75,22.13 92.7,22.12 91.63,22.13 96.99,22.13 90.5,22.13 107.27,33.9 108.45,34.03 109.66,33.95 110.88,33.97 112.09,33.93 113.27,33.95 114.47,33.93 115.66,33.93 116.82,33.95 117.98,34.17 118.99,34.93 119.1,36.04 119.14,37.27 119.23,38.36 119.18,39.52 119.09,40.55 119.07,41.68 117.98,41.84 116.86,41.95 115.9,42.42 115.9,43.54 115.99,44.7 116.02,45.98 124.4,43.91 124.26,42.77 123.66,41.83 122.53,41.75 121.09,41.77 121.2,40.58 121.03,39.47 121.06,38.23 121.08,37.16 121.03,35.92 120.91,34.65 120.25,33.63 118.02,32.6 119.21,32.76 121.24,32.75 122.35,32.76 123.46,32.73 124.56,32.73 125.68,32.78 126.8,32.76 127.9,32.9 129.07,33.02 129.93,33.72 130.32,34.79 130.37,36.04 130.29,37.34 130.27,38.52 130.34,39.68 130.26,40.82 130.08,41.94 128.87,41.92 127.6,42.04 127.13,43.02 126.99,44.29 127.08,45.67 132.26,41.51 133.57,41.71 134.85,41.97 135.52,42.91 135.39,44.25 135.42,45.41 132.32,40.26 132.28,38.92 132.22,37.36 132.15,36.04 132.19,34.73 132.04,33.48 131.44,32.56 128.45,31.34 129.5,31.4 130.71,31.43 131.89,31.43 132.97,31.45 134.05,31.4 135.13,31.46 136.32,31.54 137.35,31.56 138.5,31.47 139.65,31.59 140.76,32.02 141.43,32.91 141.46,34.19 141.54,35.28 141.41,36.47 141.31,37.65 141.33,38.82 141.4,39.96 141.32,41.2 140.43,41.81 139.09,41.96 138.3,42.69 138.38,43.74 143.25,41.17 144.11,41.86 145.22,41.98 146.44,42.18 146.32,43.3 146.23,44.32 143.4,39.89 143.35,38.7 143.37,37.43 143.36,36.25 143.35,35.12 143.37,33.89 143.22,32.63 142.9,31.64 142.16,30.85 141.23,30.23 143.16,30.2 144.28,30.56 145.24,31.11 145.97,32.04 146.54,32.97 147.11,33.98 147.52,35.02 147.94,36.07 148.36,37.07 148.85,38.07 149.36,39.08 149.92,40.26 150.68,41.66 149.45,42.15 149.21,43.19 149.17,44.37 149.23,45.79 152.32,40.94 153,41.77 154.23,41.9 155.48,42 156.6,42.09 157.49,42.95 157.55,44.04 157.47,45.23 151.93,39.82 151.26,38.88 150.86,37.76 150.33,36.78 149.83,35.8 149.26,34.67 148.67,33.57 148.23,32.46 147.7,31.39 147.07,30.32 145.96,29.47 148.69,31.05 149.23,32.14 149.8,33.23 150.46,34.35 151.31,35.3 152.17,36.1 153.07,36.87 153.98,37.69 154.3,38.82 154.44,40.12 154.35,35.33 154.38,34.16 154.71,32.99 155.83,32.99 153.41,34.76 152.58,33.96 151.82,33.14 151.43,32.07 150.77,30.98 149.98,29.79 149.09,29.28 148,28.58 150.06,28.43 151.23,28.35 152.4,28.25 153.59,28.04 154.28,29 154.77,30.12 155.92,30.27 156.31,22.07 155.05,22.2 154.33,23.05 154.3,24.19 154.27,25.41 153.5,26.26 152.4,26.53 151.33,26.63 150.23,26.85 149.09,26.97 148.01,26.97 146.83,27.07 148.49,25.9 149.31,25.08 149.83,24.12 150.25,23.03 150.71,21.93 151.32,20.89 152.05,19.89 152.95,19.15 153.88,18.06 154.77,19.17 155.89,19.23 157.1,19.17 158.33,19.18 155.75,11 154.63,11.33 153.94,12.23 153.91,13.46 153.85,14.73 153.44,15.91 152.46,16.63 151.52,17.39 150.56,18.43 149.92,19.53 149.51,20.56 148.92,21.62 148.35,22.79 147.94,23.99 147.08,25.08 146.1,25.9 148.76,19.51 149.04,18.26 149.38,17.07 149.6,15.78 149.95,14.35 150.31,12.88 150.8,11.39 151.37,10.06 152.17,8.91 152.82,7.73 153.97,6.75 154.44,7.82 155.52,8.44 156.67,8.43 157.86,8.5 153.79,4.03 152.75,4.95 151.73,5.63 150.86,6.55 150.04,7.57 149.27,8.61 148.76,9.91 148.23,11.22 148.09,12.29 147.84,13.44 147.54,14.57 147.25,15.84 147.04,17.14 146.78,18.38 146.69,19.56 146.67,20.81 146.34,22.17 145.62,23.31 144.93,24.49 143.71,25.01 142.5,25.32 140.85,25.56 139.44,25.59 137.93,25.54 136.56,25.54 135.38,25.6 134.11,25.71 103.55,35.38 104.77,35.33 105.93,35.38 107.1,35.77 107.84,36.55 107.92,37.68 108.03,38.94 108.01,40.01 107.97,41.14 106.99,41.8 105.75,41.95 104.76,42.65 104.89,43.69 113.11,43.9 113.14,42.69 112.49,41.87 111.31,41.84 109.86,41.75 109.86,40.45 109.89,39.34 109.89,38.26 109.95,37.08 109.8,36.03 109.14,35.05 110.35,17.07 109.25,17.07 108.12,17.07 107.01,17.07 105.91,17.07 104.81,17.07 103.74,17.07 102.56,17.07 101.47,17.07 100.27,17.07 99.18,17.07 98.12,17.07 95.86,17.07 94.8,17.07 93.75,17.07 92.71,17.07 91.63,17.07 97,17.07 90.51,17.07
  pour Top (isolate 0.152, rank 2): 0.25,47.93 0.25,-0.1 160.26,-0.1 160.26,47.93
  pour Top (isolate 0.152, no thermals): 8.7,41.95 8.7,22.11 16.5,14.31 19.87,3.77 21.26,2.38 54.07,2.38 56.59,4.9 56.59,12.2 58.7,14.31 78.19,14.31 79.47,15.59 79.47,36.43 19.91,36.43 14.37,41.97 8.96,41.97 8.94,41.95
  pour Top (no thermals): 72.67,23.04 72.67,22.84 73.48,22.84 73.48,22.86 73.56,22.94 73.46,23.04
  pour Top (no thermals): 72.67,27.89 72.67,27.69 73.89,27.69 73.89,27.94 73.86,27.97 73.66,27.97 73.63,27.94 73.58,27.94 73.56,27.92 73.48,27.92 73.46,27.89
  pour Top (isolate 0.152, no thermals): 78.42,36.46 78.42,15.61 79.07,14.96 101.64,14.96 104.39,12.2 104.39,4.89 107.33,1.95 137.81,1.95 139.81,3.95 149.07,14.96 153.75,19.64 153.75,34.59 151.88,36.46
  pour Route2 (no thermals): 0.25,46.99 0.25,-1.27 159.27,-1.27 160.27,-0.27 160.27,49.53 1.25,49.53 0.25,48.53
  pour Route15 (no thermals): 0.25,46.99 0.25,-1.27 159.27,-1.27 160.27,-0.27 160.27,46.99
  pour Bottom (no thermals): 0.25,46.99 0.25,-0.27 1.25,-1.27 160.27,-1.27 160.27,48.53 159.27,49.53 0.25,49.53
  pour Top (isolate 0.152, no thermals): 20.83,27.18 20.83,25.91 21.08,25.66 73.41,25.66 73.41,27.69 73.15,27.94 21.59,27.94
N$1
  Top 0.178: U$1.P$1 arc90 72.03,29.45 18.77,29.45 arc-71 12.38,34 X1.P
N$2
  Top 0.178: U$2.P$1 arc-90 73.36,20.97 73.36,20.34 arc-90 71.96,18.93 45.34,18.93 arc90 42.8,16.39 R1.1
N$3
  Top 0.178: U$3.P$1 73.09,28.79 arc90 73.68,29.38 73.68,29.85 arc90 72.83,30.7 21.38,30.7 arc-90 18.84,33.24 X2.P
N$4
  Top 0.178: U$4.P$1 71.98,22.24 arc33 71.43,22.08 arc-46 69.95,21.46 39.04,21.46 arc90 36.5,18.92 R2.1
N$5
  Top 0.178: U$5.P$1 13.73,28.49 arc-67 10.62,30.55 arc48 X3.P
N$6
  Top 0.178: U$6.P$1 72.94,22.64 arc-90 74.65,20.93 74.65,20.18 arc-90 72.11,17.64 48.48,17.64 arc90 45.94,15.1 R3.1
N$7
  Top 0.178: U$7.P$1 73.16,28.09 arc90 75.37,30.3 75.37,30.73 arc90 74.14,31.96 32.39,31.96 arc-90 29.85,34.5 X4.P
N$8
  Top 0.178: U$8.P$1 arc-90 70.96,20.21 42.16,20.21 arc90 39.62,17.67 R4.1
N$9
  Top 0.178: U$9.P$1 13.28,27.79 arc16 X5.P
N$10
  Top 0.178: U$10.P$1 73.38,23.24 arc-90 75.92,20.7 75.92,18.93 arc-90 73.53,16.54 51.86,16.54 arc90 49.17,13.85 R5.1
N$11
  Top 0.178: U$11.P$1 74.17,27.49 arc90 76.71,30.03 76.71,31.56 arc90 74.95,33.32 43.54,33.32 arc-90 41,35.86 X6.P
N$12
  Top 0.178: U$12.P$1 71.88,23.64 arc19 69.99,23.95 32.72,23.95 arc90 30.18,21.41 R6.1
N$13
  Top 0.178: U$13.P$1 75.55,26.8 arc90 78.09,29.34 78.09,31.8 arc90 75.26,34.63 54.37,34.63 arc-90 52.11,36.88 X7.P
N$14
  Top 0.178: U$14.P$1 74.65,23.94 arc-90 77.19,21.4 77.19,18.37 arc-90 74.65,15.83 54.91,15.83 arc90 52.37,13.29 R7.1
N$15
  Top 0.178: U$15.P$1 20.05,27.1 arc61 13,22.97 arc-46 X8.P
N$16
  Top 0.178: R8.1 33.32,20.16 arc-90 35.86,22.7 70.34,22.7 arc-16 71.82,22.93 U$16.P$1
N$17
  Top 0.178: X9.P arc43 6.64,5.62 arc33 16.32,22.37 arc-76 21.14,26.15 71.54,26.15 arc44 U$17.P$1
N$18
  Top 0.178: U$18.P$1 arc90 71.41,25.22 29.59,25.22 arc90 27.05,22.68 R9.1
N$19
  Top 0.178: U$19.P$1 142.34,26.5 arc-86 147.76,21.45 arc18 150.44,9.73 arc59 X10.P
N$20
  Top 0.178: U$20.P$1 87.72,21.95 arc-24 88.54,21.67 arc30 89.19,21.5 120.87,21.5 arc-90 123.41,18.96 R10.1
N$21
  Top 0.178: U$21.P$1 81.89,26.8 arc-90 79.35,29.34 79.35,31.92 arc-90 81.89,34.46 106.41,34.46 arc90 108.95,37 X11.P
N$22
  Top 0.178: U$22.P$1 86,22.25 arc90 85.7,21.95 85.7,21.52 arc90 88.24,18.98 114.53,18.98 arc-90 117.07,16.44 R11.1
N$23
  Top 0.178: U$23.P$1 83.13,27.49 arc-90 80.59,30.03 80.59,30.72 arc-90 83.08,33.21 117.61,33.21 arc90 120.15,35.75 X12.P
N$24
  Top 0.178: U$24.P$1 87.82,22.64 arc10 89.07,22.75 124.02,22.75 arc-90 126.56,20.21 R12.1
N$25
  Top 0.178: U$25.P$1 143.82,27.1 arc-72 149.38,23.04 arc54 X13.P
N$26
  Top 0.178: U$26.P$1 85.71,22.94 arc90 84.44,21.67 84.44,20.24 arc90 86.98,17.7 111.45,17.7 arc-90 113.98,15.16 R13.1
N$27
  Top 0.178: U$27.P$1 84.12,28.09 arc-90 81.84,30.38 arc-90 83.43,31.97 128.7,31.97 arc90 131.25,34.52 X14.P
N$28
  Top 0.178: U$28.P$1 arc90 87.79,20.24 117.72,20.24 arc-90 120.26,17.7 R14.1
N$29
  Top 0.178: U$29.P$1 144.68,28.49 arc66 150.18,32.07 arc-62 X15.P
N$30
  Top 0.178: U$30.P$1 85.19,23.64 arc90 83.2,21.65 83.2,18.87 arc90 85.66,16.4 108.26,16.4 arc-90 110.87,13.79 R15.1
N$31
  Top 0.178: U$31.P$1 84.07,28.79 arc-90 83.14,29.72 arc-90 84.13,30.71 139.82,30.71 arc90 142.36,33.25 X16.P
N$32
  Top 0.178: U$32.P$1 87.04,23.94 arc62 87.91,24.46 arc-51 88.95,25.24 130.29,25.24 arc-90 132.83,22.7 R16.1
N$33
  Top 0.178: U$33.P$1 arc-90 86.76,29.46 143.59,29.46 arc66 146.98,31.68 arc-5 X17.P
N$34
  Top 0.178: U$34.P$1 84.45,24.24 arc90 81.91,21.7 81.91,18.31 arc90 84.45,15.77 105.22,15.77 arc-90 107.76,13.23 R17.1
N$35
  Top 0.178: U$35.P$1 146.92,27.79 arc-17 X18.P
N$36
  Top 0.178: U$36.P$1 87.62,23.24 arc59 88.16,23.55 arc-57 88.92,23.99 127.18,23.99 arc-90 129.72,21.45 R18.1

## Text on the board
tPlace: 8 6 4 2 1 / 3 / 5 / 7 / 9 | 1 2 4 6 8 / 3 / 5 / 7 / 9